# Altium PCB PowerMonito.PcbDoc
Units mil, origin at the board's own origin, x right, y up, seen from the top; angles counter-clockwise.
Board outline 24000 x 20000 mil, 4 copper layers (Top Layer, Mid-Layer 1, Mid-Layer 2, Bottom Layer); 138 components, 65 nets, 399 pads, 94 vias.
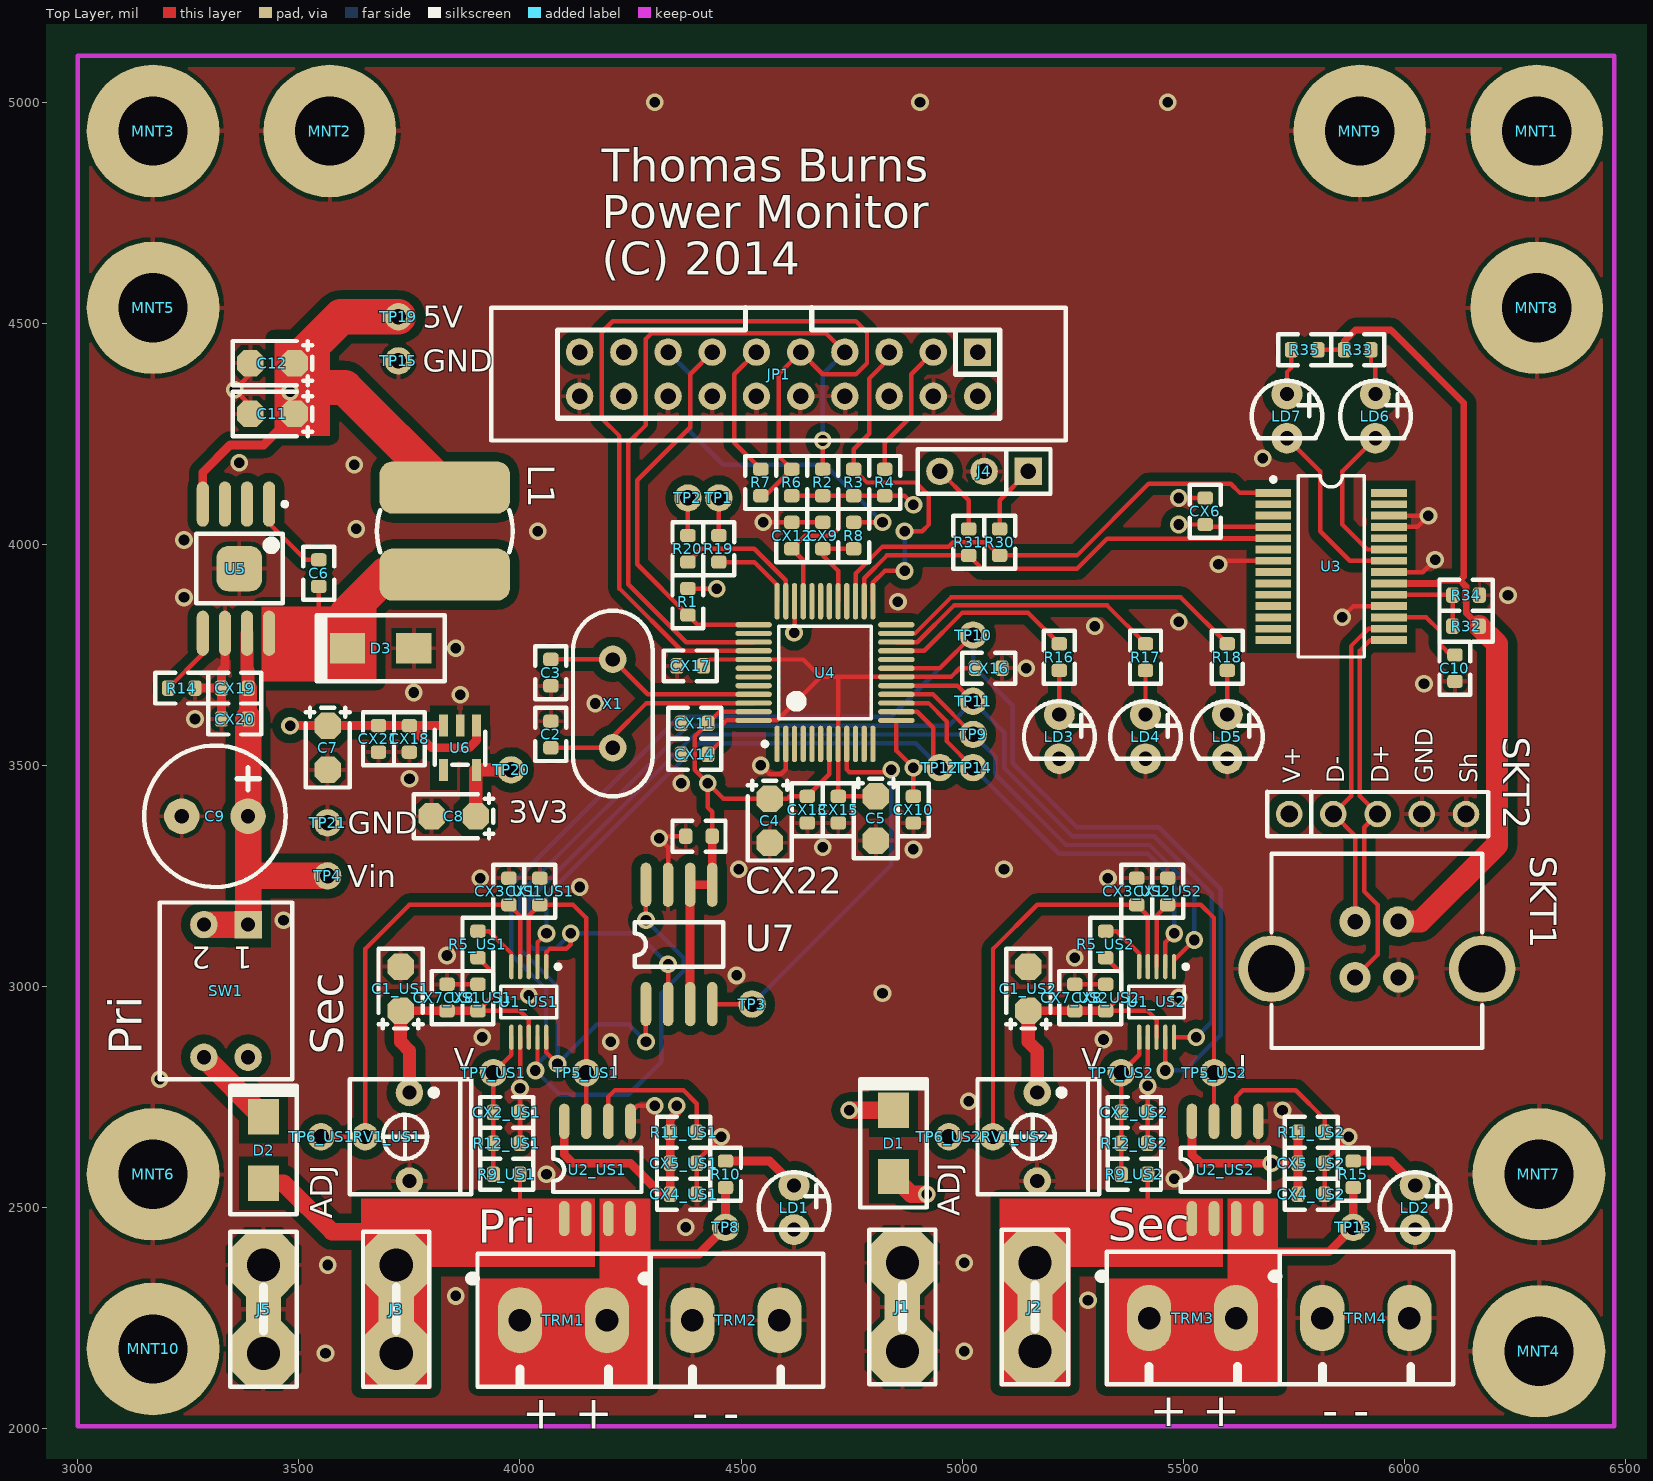
[diagram p0: Top Layer view]
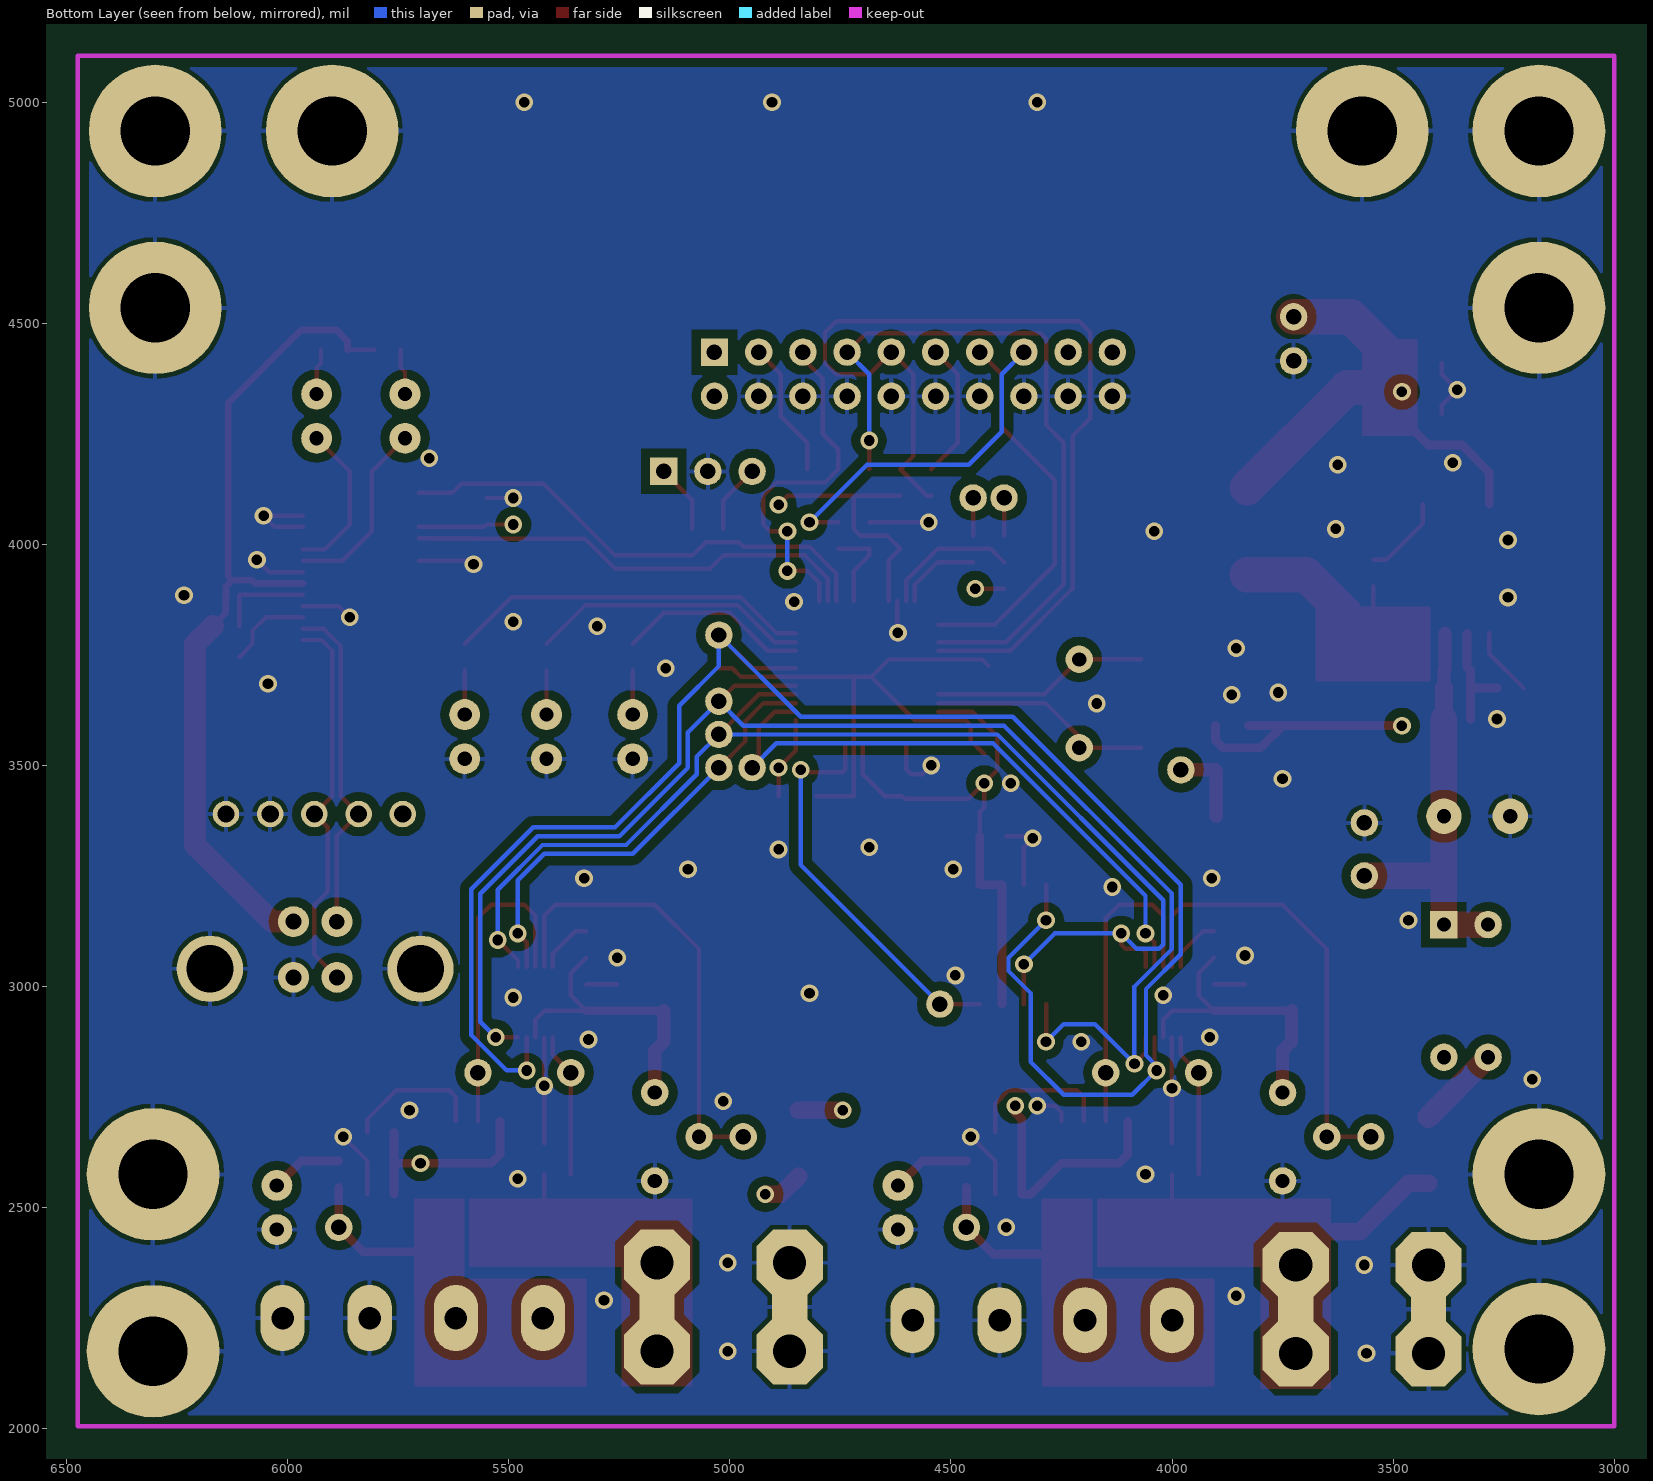
[diagram p1: Bottom Layer view, seen from below]
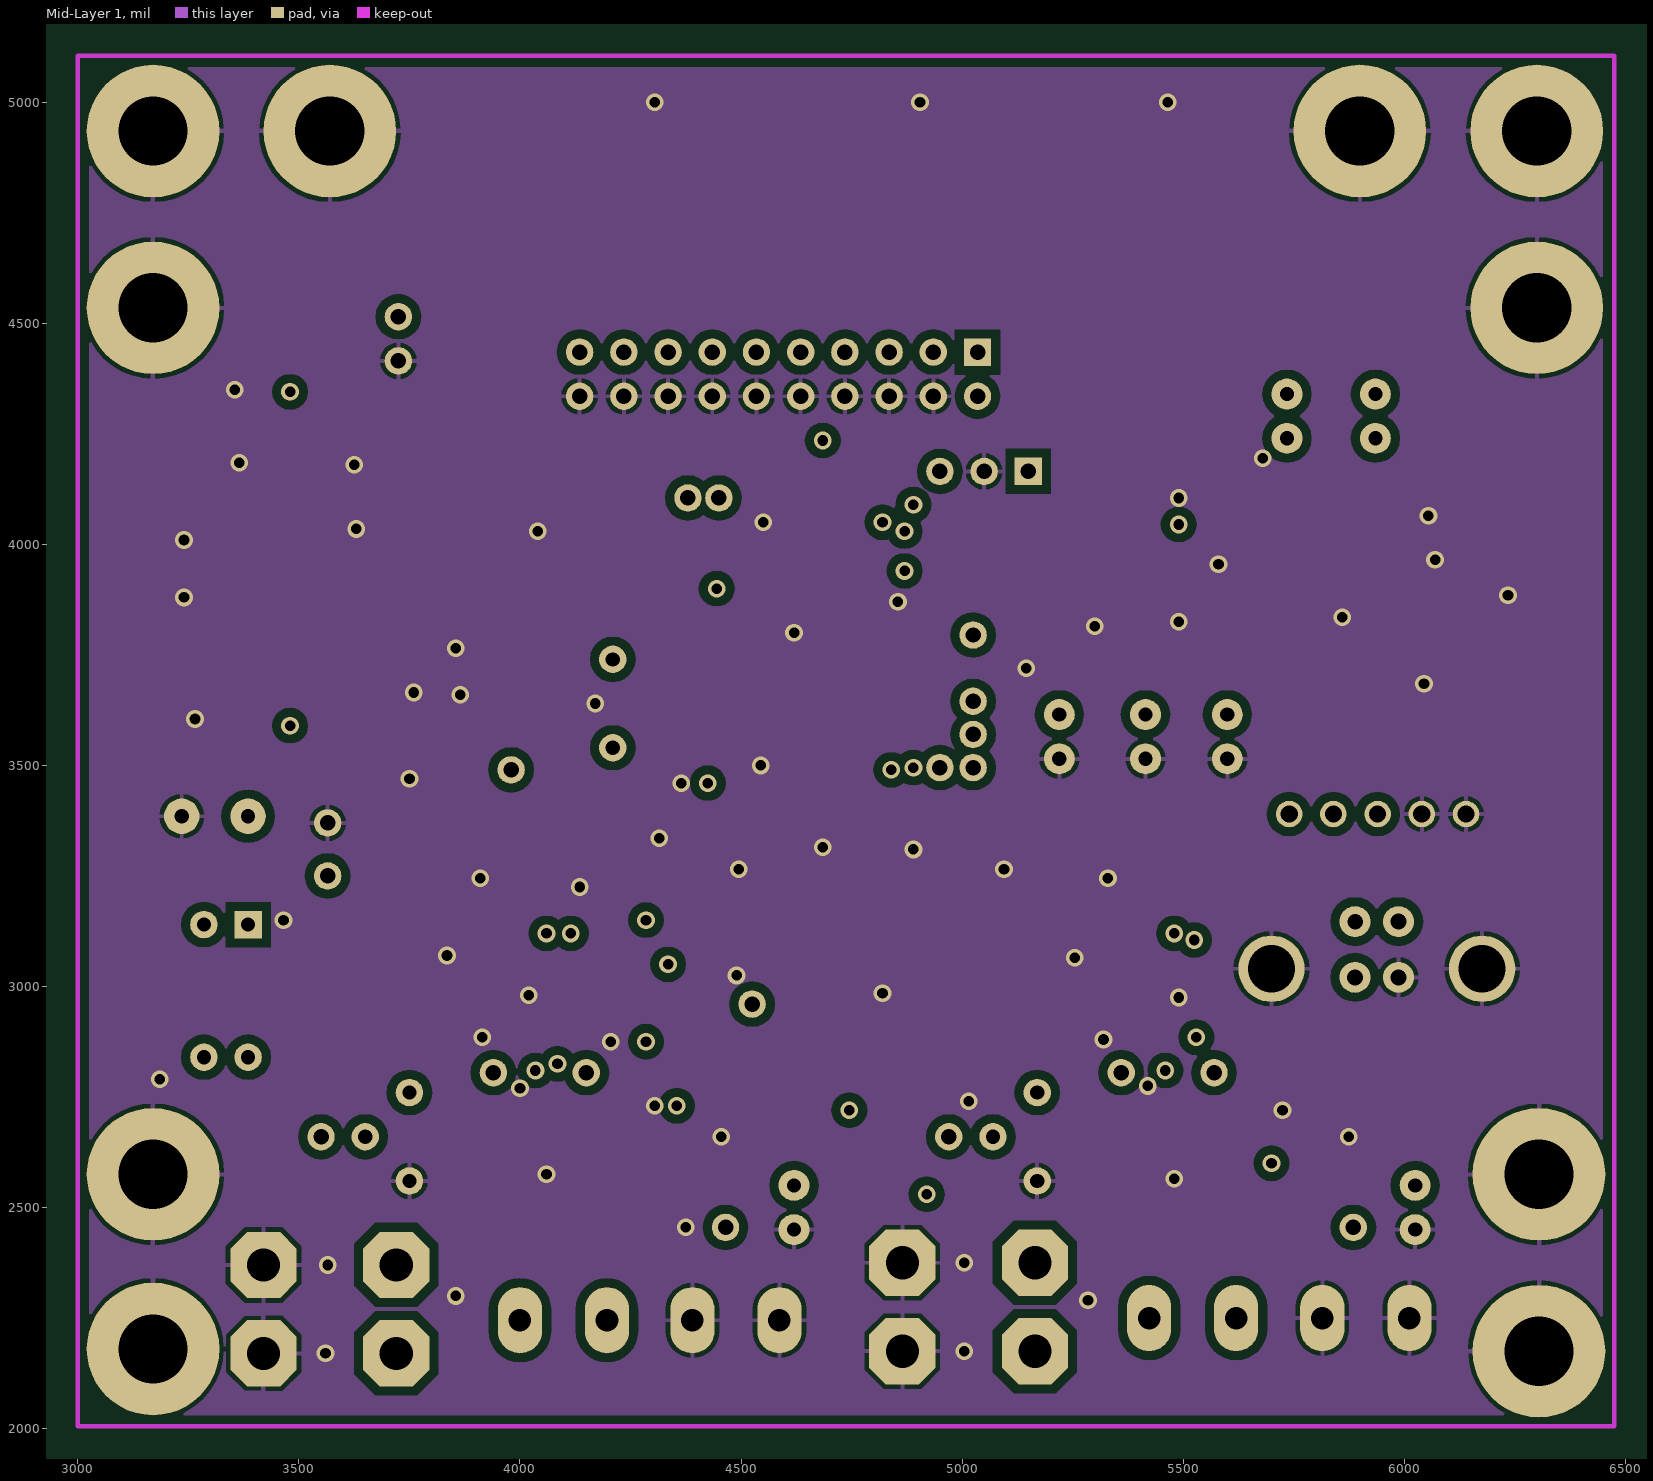
[diagram p2: Mid-Layer 1]
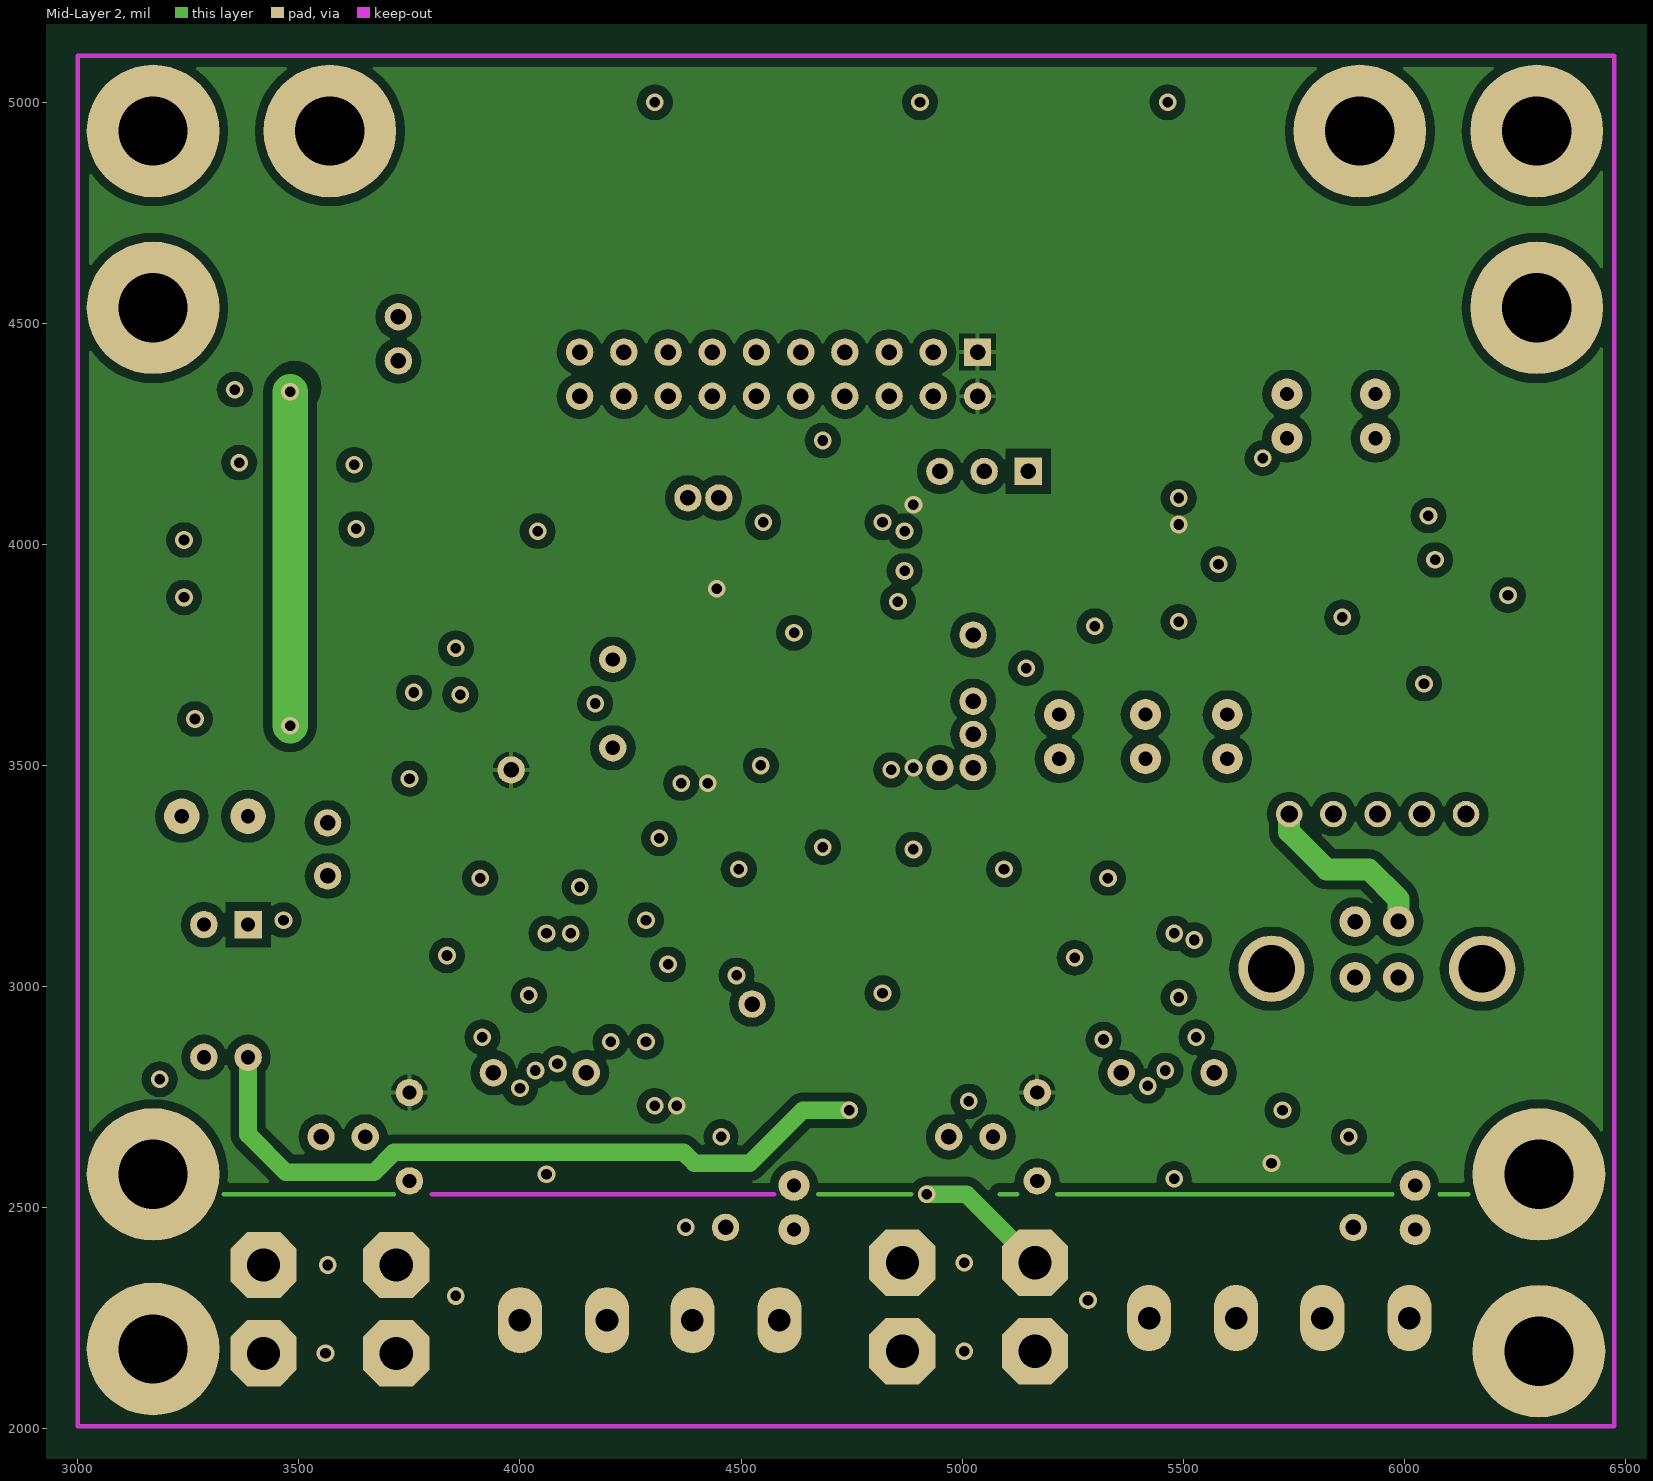
[diagram p3: Mid-Layer 2]

## Layer stack, top to bottom
Top Layer: signal copper 1.4
Dielectric: core 12.6, FR-4, Dk 4.8
Mid-Layer 1: signal copper 1.4
Dielectric: prepreg 12.6, FR-4, Dk 4.8
Mid-Layer 2: signal copper 1.4
Dielectric: core 12.6, FR-4, Dk 4.8
Bottom Layer: signal copper 1.4

## Board outline
1000,870 25000,870 25000,20870 1000,20870

## Design rules (kind name [scope] priority, off if disabled: settings)
Clearance Clearance_poly [InPoly] p1: gap=20
Clearance [All] p2: gap=7
ComponentClearance [All] p1 off: gap=10 collisioncheckmode=3 verticalgap=10 showdistances=FALSE
FabricationTestPointUsage TestPointUsage [All] p1: valid=0 allowmultiple=FALSE
FabricationTestpoint Testpoint [All] p1: side=3 testpointundercomponent=TRUE minsize=40 maxsize=100 preferedsize=60 minholesize=0 maxholesize=40 preferedholesize=32 testpointgrid=1 allowsidetop=TRUE allowsidebottom=TRUE usegrid=TRUE gridtolerance=0.01
HoleSize [All] p1: absolutevalues=TRUE maxlimit=350 minlimit=24 maxpercent=80.000 minpercent=20.000
MinimumAnnularRing [All] p1: minimumring=8
PlaneClearance [All] p1: clearance=12
PolygonConnect PolygonConnect_via [IsVia] p1: connectstyle=Direct reliefconductorwidth=10 reliefentries=4 polygonreliefangle="90 Angle" airgapwidth=10
PolygonConnect [All] p2: connectstyle=Relief reliefconductorwidth=10 reliefentries=4 polygonreliefangle="90 Angle" airgapwidth=10
RoomDefinition US1 [InComponentClass('US1')] p1: confinementstyle=ConfineIn formatcopy=TRUE lockcomponents=FALSE outline 3450,2005 4475,2005 4475,3380 3450,3380
RoomDefinition UU1 [InComponentClass('UU1')] p2: confinementstyle=ConfineIn formatcopy=TRUE lockcomponents=FALSE outline 4495,2755 6475,2755 6475,5105 4495,5105
RoomDefinition US2 [InComponentClass('US2')] p3: confinementstyle=ConfineIn formatcopy=TRUE lockcomponents=FALSE outline 4870,2005 5895,2005 5895,3380 4870,3380
RoomDefinition UP [InComponentClass('UP')] p4: confinementstyle=ConfineIn formatcopy=TRUE lockcomponents=FALSE outline 3005,3145 4040,3145 4040,4625 3005,4625
RoomDefinition U_CPU [InComponentClass('U_CPU')] p5: confinementstyle=ConfineIn formatcopy=TRUE lockcomponents=FALSE outline 3000,2005 6475,2005 6475,5105 3000,5105
RoomDefinition TopView [InComponentClass('TopView')] p6: confinementstyle=ConfineIn formatcopy=TRUE lockcomponents=FALSE outline 3000,2005 6485,2005 6485,5130 3000,5130
RoutingVias [All] p1: holewidth=24 width=40 viastyle="Through Hole" minholewidth=24 minwidth=35 maxholewidth=28 maxwidth=50
SilkscreenOverComponentPads [All vs (IsText AND OnLayer('Top Overlay'))] p1: minsilkscreentomaskgap=10
SolderMaskExpansion [All] p1: expansion=4
Width [All] p1: maxlimit=150 minlimit=10 preferedwidth=10
22 further rules are at their usual default settings.

## Classes and differential pairs
component class TopView: D1 D2 J1 J2 J3 J5 LD1 LD2 LD3 LD4 LD5 MNT1 MNT2 MNT3 MNT4 MNT5 MNT6 MNT7 MNT8 MNT9 MNT10 R10 R15 R16 R17 R18 R19 R20 SW1 TP1 TP2 TP8 TP9 TP10 TP11 TP12 TP13 TP14 TRM1 TRM2 TRM3 TRM4
component class U_CPU: C2 C3 C4 C5 CX9 CX10 CX11 CX12 CX13 CX14 CX15 CX16 CX17 CX22 JP1 R1 R2 R3 R4 R6 R7 R8 TP3 U4 U7 X1
component class UP: C6 C7 C8 C9 C11 C12 CX18 CX19 CX20 CX21 D3 L1 R14 TP4 TP15 TP19 TP20 TP21 U5 U6
component class US1: C1_US1 CX1_US1 CX2_US1 CX3_US1 CX4_US1 CX5_US1 CX7_US1 CX8_US1 R5_US1 R9_US1 R11_US1 R12_US1 RV1_US1 TP5_US1 TP6_US1 TP7_US1 U1_US1 U2_US1
component class US2: C1_US2 CX1_US2 CX2_US2 CX3_US2 CX4_US2 CX5_US2 CX7_US2 CX8_US2 R5_US2 R9_US2 R11_US2 R12_US2 RV1_US2 TP5_US2 TP6_US2 TP7_US2 U1_US2 U2_US2
component class UU1: C10 CX6 J4 LD6 LD7 R30 R31 R32 R33 R34 R35 SKT1 SKT2 U3
channel class Sensors: US1 US2

## Components (designator, comment, footprint, x,y, rotation, side; value= is the part's Value field where it differs from the comment)
C1_US1 "10uF 10V T" SMD-TANT-A 3730,2945 r90 top (schematic designator C1)
C1_US2 "10uF 10V T" SMD-TANT-A 5150,2945 r90 top (schematic designator C1)
C2 "10p" 0603 4070,3540 r90 top
C3 "10p" 0603 4070,3740 r270 top
C4 "10uF 10V T" SMD-TANT-A 4565,3425 r270 top
C5 "10uF 10V T" SMD-TANT-A 4805,3430 r270 top
C6 "10n" 0603 3545,3965 r270 top
C7 "10uF 10V T" SMD-TANT-A 3565,3590 r270 top
C8 "10uF 10V T" SMD-TANT-A 3900,3385 r180 top
C9 "220u 25V" RB.15/.32 3385,3385 r270 top
C10 "100n" 0603 6115,3690 r90 top
C11 "10uF 10V Tant" SMD-TANT-A 3490,4295 r180 top
C12 "10uF 10V Tant" SMD-TANT-A 3490,4410 r180 top
CX1_US1 "100n" 0603 4045,3245 r270 top (schematic designator CX1)
CX1_US2 "100n" 0603 5465,3245 r270 top (schematic designator CX1)
CX2_US1 "100n" 0603 3940,2715 r0 top (schematic designator CX2)
CX2_US2 "100n" 0603 5360,2715 r0 top (schematic designator CX2)
CX3_US1 "100n" 0603 3975,3245 r270 top (schematic designator CX3)
CX3_US2 "100n" 0603 5395,3245 r270 top (schematic designator CX3)
CX4_US1 "100n" 0603 4400,2530 r180 top (schematic designator CX4)
CX4_US2 "100n" 0603 5820,2530 r180 top (schematic designator CX4)
CX5_US1 "10n" 0603 4400,2600 r180 top (schematic designator CX5)
CX5_US2 "10n" 0603 5820,2600 r180 top (schematic designator CX5)
CX6 "100n" 0603 5550,4105 r270 top
CX7_US1 "100n" 0603 3835,3005 r270 top (schematic designator CX7)
CX7_US2 "100n" 0603 5255,3005 r270 top (schematic designator CX7)
CX8_US1 "10n" 0603 3905,3005 r270 top (schematic designator CX8)
CX8_US2 "10n" 0603 5325,3005 r270 top (schematic designator CX8)
CX9 "100n" 0603 4685,4050 r270 top
CX10 "100n" 0603 4890,3370 r90 top
CX11 "100n" 0603 4365,3595 r0 top
CX12 "100n" 0603 4615,4050 r270 top
CX13 "100n" 0603 4650,3370 r90 top
CX14 "100n" 0603 4365,3525 r0 top
CX15 "100n" 0603 4720,3370 r90 top
CX16 "100n" 0603 5090,3720 r180 top
CX17 "100n" 0603 4355,3725 r0 top
CX18 "100n" 0603 3750,3590 r270 top
CX19 "100n" 0603 3325,3675 r0 top
CX20 "10n" 0603 3325,3605 r0 top
CX21 "10n" 0603 3680,3530 r90 top
CX22 "100n" 0603 4375,3340 r0 top
D1 "SS14" DO-214AC 4845,2645 r270 top
D2 "SS14" DO-214AC 3420,2630 r270 top
D3 "SS14" DO-214AC 3685,3765 r0 top
J1 "SPADE" SPADE6.3-V 4865,2175 r180 top
J2 "SPADE" SPADE6.3-V 5165,2175 r180 top
J3 "SPADE" SPADE6.3-V 3720,2370 r0 top
J4 "DNF" sip3 5150,4165 r180 top
J5 "SPADE" SPADE6.3-V 3420,2170 r180 top
JP1 "HEADER 10X2" IDC20BOX 5035,4435 r180 top
L1 "330uH 1A" INDUCTOR16 3830,4030 r270 top
LD1 "LED" LED3 4620,2550 r270 top
LD2 "LED" LED3 6025,2550 r270 top
LD3 "LED" LED3 5220,3615 r270 top
LD4 "LED" LED3 5415,3615 r270 top
LD5 "LED" LED3 5600,3615 r270 top
LD6 "LED" LED3 5935,4340 r270 top
LD7 "LED" LED3 5735,4340 r270 top
MNT1 "M3 Mount Hole" Mount_M3 6300,4935 r0 top
MNT2 "M3 Mount Hole" Mount_M3 3570,4935 r0 top
MNT3 "M3 Mount Hole" Mount_M3 3170,4935 r0 top
MNT4 "M3 Mount Hole" Mount_M3 6305,2175 r0 top
MNT5 "M3 Mount Hole" Mount_M3 3170,4535 r0 top
MNT6 "M3 Mount Hole" Mount_M3 3170,2575 r0 top
MNT7 "M3 Mount Hole" Mount_M3 6305,2575 r0 top
MNT8 "M3 Mount Hole" Mount_M3 6300,4535 r0 top
MNT9 "M3 Mount Hole" Mount_M3 5900,4935 r0 top
MNT10 "M3 Mount Hole" Mount_M3 3170,2180 r0 top
R1 "47K" 0603 4380,3840 r90 top
R2 "47K" 0603 4685,4170 r270 top
R3 "47K" 0603 4755,4170 r270 top
R4 "47K" 0603 4825,4170 r270 top
R5_US1 "470R" 0603 3905,3125 r270 top (schematic designator R5)
R5_US2 "470R" 0603 5325,3125 r270 top (schematic designator R5)
R6 "47K" 0603 4615,4170 r270 top
R7 "1k" 0603 4545,4170 r270 top
R8 "1k" 0603 4755,4050 r270 top
R9_US1 "470R" 0603 3940,2575 r0 top (schematic designator R9)
R9_US2 "470R" 0603 5360,2575 r0 top (schematic designator R9)
R10 "1k" 0603 4465,2605 r270 top
R11_US1 "1k" 0603 4340,2670 r0 top (schematic designator R11)
R11_US2 "1k" 0603 5760,2670 r0 top (schematic designator R11)
R12_US1 "470R" 0603 4000,2645 r180 top (schematic designator R12)
R12_US2 "470R" 0603 5420,2645 r180 top (schematic designator R12)
R14 "DNF" 0603 3265,3675 r180 top
R15 "1k" 0603 5885,2605 r270 top
R16 "1k" 0603 5220,3715 r90 top
R17 "1k" 0603 5415,3715 r90 top
R18 "1k" 0603 5600,3715 r90 top
R19 "1k" 0603 4450,4020 r270 top
R20 "1k" 0603 4380,4020 r270 top
R30 "330R" 0603 5085,4035 r270 top
R31 "330R" 0603 5015,4035 r270 top
R32 "4k7" 0603 6170,3815 r180 top
R33 "330R" 0603 5865,4440 r0 top
R34 "10k" 0603 6170,3885 r180 top
R35 "330R" 0603 5805,4440 r180 top
RV1_US1 "2k" VR3362P 3750,2660 r90 top (schematic designator RV1)
RV1_US2 "2k" VR3362P 5170,2660 r90 top (schematic designator RV1)
SKT1 "USB B Vertical" USB_B_Vertical 5987.4,3146.69 r0 top
SKT2 "Socket Strip" USB_SocketStrip 5840,3390 r0 top
SW1 "SW-DIP2" DIPSW2 3385,3140 r180 top
TP1 "TestPad" TestPad 4450,4105 r0 top
TP2 "TestPad" TestPad 4380,4105 r90 top
TP3 "TestPad" TestPad 4525,2960 r90 top
TP4 "TestPad" TestPad 3565,3250 r0 top
TP5_US1 "TestPad" TestPad 4150,2805 r90 top (schematic designator TP5)
TP5_US2 "TestPad" TestPad 5570,2805 r90 top (schematic designator TP5)
TP6_US1 "TestPad" TestPad 3550,2660 r90 top (schematic designator TP6)
TP6_US2 "TestPad" TestPad 4970,2660 r90 top (schematic designator TP6)
TP7_US1 "TestPad" TestPad 3940,2805 r90 top (schematic designator TP7)
TP7_US2 "TestPad" TestPad 5360,2805 r90 top (schematic designator TP7)
TP8 "TestPad" TestPad 4465,2455 r90 top
TP9 "TestPad" TestPad 5025,3570 r90 top
TP10 "TestPad" TestPad 5025,3795 r90 top
TP11 "TestPad" TestPad 5025,3645 r90 top
TP12 "TestPad" TestPad 4950,3495 r90 top
TP13 "TestPad" TestPad 5885,2455 r90 top
TP14 "TestPad" TestPad 5025,3495 r90 top
TP15 "TestPad" TestPad 3725,4415 r90 top
TP19 "TestPad" TestPad 3725,4515 r90 top
TP20 "TestPad" TestPad 3980,3490 r90 top
TP21 "TestPad" TestPad 3565,3370 r90 top
TRM1 "Screw Terminal, 5mm, x2" Terms5mm2 4000,2245 r0 top
TRM2 "Screw Terminal, 5mm, x2" Terms5mm2 4390,2245 r0 top
TRM3 "Screw Terminal, 5mm, x2" Terms5mm2 5423.15,2250 r0 top
TRM4 "Screw Terminal, 5mm, x2" Terms5mm2 5815,2250 r0 top
U1_US1 "24 Bit ADC" MSOP-UN10_L 4020,2965 r270 top (schematic designator U1)
U1_US2 "24 Bit ADC" MSOP-UN10_L 5440,2965 r270 top (schematic designator U1)
U2_US1 "12.5A Current Sensor" SO-8 4100,2475 r90 top (schematic designator U2)
U2_US2 "12.5A Current Sensor" SO-8 5520,2475 r90 top (schematic designator U2)
U3 "FT232R" ssop28 5835,3950 r270 top
U4 "ATSAM4N8A" 48A_M 4690,3710 r90 top locked
U5 "LM22674MRE-5.0" PSOP-8 3365,3945 r270 top
U6 "XC6210B332MR" SOT-25-A 3827.01,3490 r0 top
U7 "AT45DB321D(8)" SO-8W-MLF 4285,2960 r90 top
X1 "12MHz" XTAL-V2 4210,3740 r270 top

## Footprints (in the part's own frame and the unit in brackets; to place one, negate y for a bottom-side part, rotate by r counter-clockwise, add the part's x,y. Pads: shape width x height; smd on the part's side, far side on the other; paste and mask are expansions set on the pad)
48A_M [mm] "48-Pin Thin Quad Flat Pack 0.5 mm Pitch, IPC Low Density"
  oval 2.1x0.3 smd: 1(-4.1,2.75) 2(-4.1,2.25) 3(-4.1,1.75) 4(-4.1,1.25) 5(-4.1,0.75) 6(-4.1,0.25) 7(-4.1,-0.25) 8(-4.1,-0.75) 9(-4.1,-1.25) 10(-4.1,-1.75) 11(-4.1,-2.25) 12(-4.1,-2.75) 25(4.1,-2.75) 26(4.1,-2.25) 27(4.1,-1.75) 28(4.1,-1.25) 29(4.1,-0.75) 30(4.1,-0.25) 31(4.1,0.25) 32(4.1,0.75) 33(4.1,1.25) 34(4.1,1.75) 35(4.1,2.25) 36(4.1,2.75)
  oval 0.3x2.1 smd: 13(-2.75,-4.1) 14(-2.25,-4.1) 15(-1.75,-4.1) 16(-1.25,-4.1) 17(-0.75,-4.1) 18(-0.25,-4.1) 19(0.25,-4.1) 20(0.75,-4.1) 21(1.25,-4.1) 22(1.75,-4.1) 23(2.25,-4.1) 24(2.75,-4.1) 37(2.75,4.1) 38(2.25,4.1) 39(1.75,4.1) 40(1.25,4.1) 41(0.75,4.1) 42(0.25,4.1) 43(-0.25,4.1) 44(-0.75,4.1) 45(-1.25,4.1) 46(-1.75,4.1) 47(-2.25,4.1) 48(-2.75,4.1)
  silkscreen extent -4.22,-2.65 2.65,3.57, body extent -3.5,-3.5 3.5,3.5, height 1.6
0603 [mil]
  rrect50% 30x35 smd: 1(0,0) 2(60,0)
  silkscreen extent -30,-35 90,35
DIPSW2 [mil]
  rect 62x62 hole 32: 1(0,0)
  round 62 hole 32: 2(100,0) 3(100,300) 4(0,300)
  silkscreen extent -100,-50 200,350
DO-214AC [mil]
  rect 80x70 smd: A(75,0) K(-75,0)
  silkscreen extent -145,-75 145,75
IDC20BOX [mil]
  rect 62x62 hole 35: 1(0,0)
  round 62 hole 35: 2(0,100) 3(100,0) 4(100,100) 5(200,0) 6(200,100) 7(300,0) 8(300,100) 9(400,0) 10(400,100) 11(500,0) 12(500,100) 13(600,0) 14(600,100) 15(700,0) 16(700,100) 17(800,0) 18(800,100) 19(900,0) 20(900,100)
  silkscreen extent -200,-100 1100,200
INDUCTOR16 [mm]
  rrect50% 3x7.5 smd: 0(-2.5,0) 1(2.5,0)
  silkscreen extent -1.21,-3.9 1.21,3.9
LED3 [mil]
  round 70 hole 32: A(0,0) K(100,0)
  silkscreen extent -30,-80 100,80
Mount_M3 [mil]
  round 300 hole 157: 1(0,0)
MSOP-UN10_L [mm] "TSSOP, 10-Leads, Body 3x3mm, Pitch 0.5mm, IPC High Density"
  oval 1.45x0.25 smd: 1(-2.025,1) 2(-2.025,0.5) 3(-2.025,0) 4(-2.025,-0.5) 5(-2.025,-1) 6(2.025,-1) 7(2.025,-0.5) 8(2.025,0) 9(2.025,0.5) 10(2.025,1)
  silkscreen extent -2.15,-1.6 0.9,1.8, body extent -1.6,-1.6 1.6,1.6, height 1.1
PSOP-8 [mm]
  oval 2.6x0.7 smd: 1(-3.711,1.717) 2(-3.711,0.447) 3(-3.711,-0.823) 4(-3.711,-2.093) 5(3.711,-2.093) 6(3.711,-0.823) 7(3.711,0.447) 8(3.711,1.717)
  rrect50% 2.6x2.6 smd: 9(0,0)
  silkscreen extent -3.84,-2.47 1.99,2.74
RB.15/.32 [mil]
  round 80 hole 32: 1(0,0) 2(0,-150)
  silkscreen extent -160,-235 160,85
sip3 [mil]
  rect 62x62 hole 35: 1(0,0)
  round 62 hole 35: 2(100,0) 3(200,0)
  silkscreen extent -50,-50 250,50
SMD-TANT-A [mil]
  oct 60x60 smd: 1(0,0) 2(100,0)
  silkscreen extent -40,-50 140,50
SO-8 [mil]
  oval 80x24 smd: 1(0,0) 2(0,-50) 3(0,-100) 4(0,-150) 5(220,-150) 6(220,-100) 7(220,-50) 8(220,0)
  silkscreen extent 60,-175 160,25
SO-8W-MLF [mil]
  oval 100x24 smd: 1(0,0) 2(0,-50) 3(0,-100) 4(0,-150) 5(270,-150) 6(270,-100) 7(270,-50) 8(270,0)
  silkscreen extent 85,-175 185,25
SOT-25-A [mil]
  rect 20x50 smd: 1(75,100) 2(37.99,100) 3(0,100) 4(0,0) 5(75,0)
  silkscreen extent -20,12 94,91
SPADE6.3-V [mil]
  oct 150x150 hole 75: 1(0,0) 1(0,-200)
  rect 80x200 smd: 1(0,-100)
  rect 80x200 smd far side: 1(0,-100)
  silkscreen extent -75,-275 75,75
ssop28 [mm] "SSOP; 28 Leads; Body Width 5.3 mm; Pitch 0.65 mm"
  rect 0.45x2.05 smd: 1(-4.225,-3.325) 2(-3.575,-3.325) 3(-2.925,-3.325) 4(-2.275,-3.325) 5(-1.625,-3.325) 6(-0.975,-3.325) 7(-0.325,-3.325) 8(0.325,-3.325) 9(0.975,-3.325) 10(1.625,-3.325) 11(2.275,-3.325) 12(2.925,-3.325) 13(3.575,-3.325) 14(4.225,-3.325) 15(4.225,3.325) 16(3.575,3.325) 17(2.925,3.325) 18(2.275,3.325) 19(1.625,3.325) 20(0.975,3.325) 21(0.325,3.325) 22(-0.325,3.325) 23(-0.975,3.325) 24(-1.625,3.325) 25(-2.275,3.325) 26(-2.925,3.325) 27(-3.575,3.325) 28(-4.225,3.325)
  silkscreen extent -5.2,-3.45 5.2,1.9
Terms5mm2 [mil]
  oval 100x150 hole 51: 1(0,0) 2(196.85,0)
  silkscreen extent -108,-150 296,150
TestPad [mil]
  round 62 hole 35: 1(0,0)
USB_B_Vertical [mm]
  round 1.778 hole 0.92: 1(0,0) 3(-2.5,-3.2) 4(0,-3.2)
  round 1.778 hole 0.889: 2(-2.5,0)
  round 3.81 hole 2.71: 5(-7.3,-2.71) 6(4.8,-2.71)
  silkscreen extent -7.3,-7.26 4.82,3.89
USB_SocketStrip [mil]
  round 60 hole 39: 1(-100,0) 2(0,0) 3(100,0) 4(200,0) 5(300,0)
  silkscreen extent -150,-50 350,50
VR3362P [mil]
  round 62 hole 32: CCW(-100,0) CW(100,0) W(0,100)
  silkscreen extent -130,-140 130,135
XTAL-V2 [mil]
  round 62 hole 32: 1(0,0) 2(200,0)
  silkscreen extent -110,-90 310,90

## Part data
C1_US1 C1_US2 C4 C5 C7 C8 C9 C11 C12: library part "CAPACITOR POL-S"
C2 C3 CX18: library part cap
C6 C10 CX1_US1 CX1_US2 CX2_US1 CX2_US2 CX3_US1 CX3_US2 CX4_US1 CX4_US2 CX5_US1 CX5_US2 CX6 CX7_US1 CX7_US2 CX8_US1 CX8_US2 CX9 CX10 CX11 CX12 CX13 CX14 CX15 CX16 CX17 CX19 CX20 CX21 CX22: library part CAP
D1 D2 D3: library part "DIODE SCHOTTKY"
J1 J2 J3 J5: library part CON1
J4: library part con3
L1: library part INDUCTOR2
MNT1 MNT2 MNT3 MNT4 MNT5 MNT6 MNT7 MNT8 MNT9 MNT10: library part M3_Mount
R1 R2 R3 R4 R6 R7 R8 R10 R14 R15 R16 R17 R18 R19 R20 R32 R33 R34 R35: library part RES8
R5_US1 R5_US2 R9_US1 R9_US2 R11_US1 R11_US2 R12_US1 R12_US2 R30 R31: library part res8
RV1_US1 RV1_US2: library part RES6
SKT1: library part USB_B_Vertical
SKT2: library part USB_Pins
TP1 TP2 TP3 TP4 TP5_US1 TP5_US2 TP6_US1 TP6_US2 TP7_US1 TP7_US2 TP8 TP9 TP10 TP11 TP12 TP13 TP14 TP15 TP19 TP20 TP21: "Test Pad"
TRM1 TRM2 TRM3 TRM4: library part ScrewTerms5mm2
U1_US1 U1_US2: library part "AD7787BRMZ 24Bit ADC", "AD7787BRMZ IC, 24BIT ADC, SMD, 7787, MSOP10"
U2_US1 U2_US2: library part ACS711_12.5A_Current, "ACS711"
U4: "Cortex-M4, 100MHz, 512K Flash, 64K SRAM"
U5: library part LM22675, "0.5A SMPS, Fixed - 5V"
U6: library part XC6204B, "3.3 LDO"
U7: library part AT45DB041(8)
X1: library part CRYSTAL

## Via types
v1: diameter 40, hole 24, Top Layer to Bottom Layer, tented both sides, 94 vias

## Nets (pads, with @x,y where several pads share a name; then routed paths per layer and width w, separated by ;. In a path a pad name is that pad's centre, name@x,y a point inside that pad or via, vN(x,y) a via of type N, cw(c..) or ccw(c..) an arc to the next point about the centre after c; other vN are vias at no path point)
ADC_VCC_IN_US1: CX2_US1.1 R9_US1.1 R12_US1.2 TP7_US1.1 U1_US1.6 | length 327.1
  Top Layer w10: R9_US1.1 TP7_US1.1 3980.63,2845.63 U1_US1.6
ADC_VCC_IN_US2: CX2_US2.1 R9_US2.1 R12_US2.2 TP7_US2.1 U1_US2.6 | length 327.1
  Top Layer w10: R9_US2.1 TP7_US2.1 5400.63,2845.63 U1_US2.6
AN1(+)_US1: CX1_US1.2 TP5_US1.1 U1_US1.3 U2_US1.7 | length 728.1
  Top Layer w10: U1_US1.3 4020,3160 CX1_US1.2 4120,3185 4150,3155 TP5_US1.1 U2_US1.7
AN1(+)_US2: CX1_US2.2 TP5_US2.1 U1_US2.3 U2_US2.7 | length 728.1
  Top Layer w10: U1_US2.3 5440,3160 CX1_US2.2 5540,3185 5570,3155 TP5_US2.1 U2_US2.7
AN1(-)_US1: CX3_US1.2 RV1_US1.W TP6_US1.1 U1_US1.4 | length 1042.2
  Top Layer w10: TP6_US1.1 RV1_US1.W 3650,3085 3750,3185 CX3_US1.2 4000.32,3159.69 U1_US1.4
AN1(-)_US2: CX3_US2.2 RV1_US2.W TP6_US2.1 U1_US2.4 | length 1042.2
  Top Layer w10: TP6_US2.1 RV1_US2.W 5070,3085 5170,3185 CX3_US2.2 5420.31,3159.69 U1_US2.4
CS1: TP12.1 U1_US1.2 U4.14 | length 1419.3
  Top Layer w10: U1_US1.2 4039.69,3099.68 v1(4060,3120) ; U4.14 4898.58,3621.42 4935,3585 4935,3510 TP12.1
  Bottom Layer w10: v1(4060,3120) 4060,3205 4405,3550 4895,3550 TP12.1
CS2: TP14.1 U1_US2.2 U4.15 | length 1024.8
  Top Layer w10: U4.15 4923.9,3641.1 4965,3600 4965,3555 TP14.1 ; U1_US2.2 5459.69,3099.68 v1(5480,3120)
  Bottom Layer w10: TP14.1 5220,3300 5420,3300 5480,3240 v1(5480,3120)
CS_DATAFLASH: TP3.1 U4.9 U7.4 | length 913.5
  Top Layer w10: U7.4 TP3.1 ; U4.9 4739.21,3490.79 4745,3485 4835,3485 v1(4840,3490)
  Bottom Layer w10: TP3.1 4840,3275 v1(4840,3490)
GND: C1_US1.2 C1_US2.2 C2.2 C3.2 C4.2 C5.2 C7.2 C8.2 C9.2 C10.1 C11.2 C12.2 CX1_US1.1 CX1_US2.1 CX2_US1.2 CX2_US2.2 CX3_US1.1 CX3_US2.1 CX4_US1.1 CX4_US2.1 CX5_US1.1 CX5_US2.1 CX6.1 CX7_US1.1 CX7_US2.1 CX8_US1.1 CX8_US2.1 CX9.1 CX10.1 CX11.1 CX12.1 CX13.1 CX14.1 CX15.1 CX16.1 CX17.1 CX18.2 CX19.1 CX20.1 CX21.1 CX22.1 D3.A J1.1 J4.2 J5.1 JP1.4 JP1.6 JP1.8 JP1.10 JP1.12 JP1.14 JP1.16 JP1.18 JP1.20 LD1.K LD2.K LD3.K LD4.K LD5.K MNT1.1 MNT2.1 MNT3.1 MNT4.1 MNT5.1 MNT6.1 MNT7.1 MNT8.1 MNT9.1 MNT10.1 R12_US1.1 R12_US2.1 R14.1 R34.1 RV1_US1.CCW RV1_US2.CCW SKT1.4 SKT1.5 SKT1.6 SKT2.4 SKT2.5 TP15.1 TP21.1 TRM2.1 TRM2.2 TRM4.1 TRM4.2 U1_US1.7 U1_US2.7 U2_US1.5 U2_US2.5 U3.7 U3.18 U3.21 U3.25 U3.26 U4.2 U4.34 U5.6 U5.9 U6.2 U7.7 | length 2622.7
  Top Layer w10: C11.2 3390,4315 v1(3355,4350) 3390,4385 C12.2 ; J5.1@3415,2175 3420,2180 J5.1@3420,2270 ; CX7_US1.1 CX8_US1.1 ; R12_US1.1 4000.32,2645.32 U1_US1.7 ; U2_US1.5 4250,2715 4265,2730 v1(4305,2730) ; U7.7 4335,3315 v1(4315,3335) 4320,3340 CX22.1 ; CX4_US1.1 CX5_US1.1 4400,2605 v1(4455,2660) ; v1(4545,3500) 4565,3480 4590,3480 4601.42,3491.42 U4.2 ; v1(4550,4050) CX12.1 CX9.1 ; v1(4620,3800) 4620,3805 4621.1,3806.1 U4.34 ; CX7_US2.1 CX8_US2.1 ; R12_US2.1 5420.31,2645.32 U1_US2.7 ; v1(5490,4105) CX6.1 ; v1(5580,3955) 5587.8,3962.8 U3.7 ; CX4_US2.1 CX5_US2.1 5820,2605 v1(5875,2660) ; v1(5860,3835) 5885.43,3860.43 U3.18 ; U3.21 6042.2,3937.2 v1(6070,3965) ; U3.25 6029.57,4039.57 v1(6055,4065) 6054.84,4065.16 U3.26
  Top Layer w20: R14.1 CX19.1 ; CX20.1 CX19.1 ; U5.6 3332.59,3722.59 3325,3715 CX19.1
  other v1: 3560,2170 5005,2175 5285,2290 3855,2300 3565,2370 5005,2375 4375,2455 5480,2565 4060,2575 5725,2720 5015,2740 4000,2770 5420.31,2775 3185,2790 4205,2875 5320,2880 3915,2885 5490,2975 4020,2980 4820,2985 4490,3025 5255,3065 3835,3070 3465,3150 4135,3225 3910,3245 5330,3245 4495,3265 5095,3265 4890,3310 4685,3315 4365,3460 3750,3470 3265,3605 4170,3640 3865,3660 3760,3665 6045,3685 5145,3720 3855,3765 5300,3815 5490,3825 4855,3870 3240,3880 6235,3885 3240,4010 4040,4030 3630,4035 3625,4180 3365,4185 5680,4195 4305,5000 4905,5000 5465,5000
MISO: TP10.1 U1_US1.9 U1_US2.9 U4.19 U7.8 | length 4297.4
  Top Layer w10: v1@4039.69,2814.68 U1_US1.9 ; v1(4285,3150) U7.8 ; U4.19 4949.84,3719.84 TP10.1 ; v1@5455,2810 5459.69,2814.68 U1_US2.9
  Bottom Layer w10: v1(4285,3150) 4370,3065 4370,3035 4320,2985 4320,2830 4245,2755 4090,2755 v1(4035,2810) 4035,2820.25 4058.97,2844.23 4058.97,2994.02 3980,3072.99 3980,3230 4360,3610 4840,3610 TP10.1 5025,3725 5115,3635 5115,3505 5260,3360 5445,3360 5585,3220 5585,2890 5505,2810 v1@5455,2810
  other v1: 5460,2810
MOSI: TP11.1 U1_US1.10 U1_US2.10 U4.17 U7.1 | length 3380.4
  Top Layer w10: U1_US1.10 4059.37,2850.63 v1(4085,2825) ; v1(4285,2875) U7.1 ; U4.17 4989.53,3680.47 TP11.1 ; U1_US2.10 5479.65,2885 v1(5530,2885)
  Bottom Layer w10: v1(4285,2875) 4245,2915 4175,2915 v1(4085,2825) 4085,3000 4000.32,3084.68 4000.32,3210.32 4380,3590 4970,3590 TP11.1 5095,3575 5095,3495 5250,3340 5435,3340 5565,3210 5565,2920 v1(5530,2885)
NetC6_1: C6.1 U5.1 | length 190.2
  Top Layer w10: U5.1 3432.59,4047.41 3515,3965 C6.1
NetC6_2: C6.2 D3.K L1.1 U5.8 | length 417.9
  Top Layer w10: C6.2 3545,3830 3550,3825
  Top Layer w80: D3.K 3610,3845 3696.57,3931.57 L1.1
NetC10_2: C10.2 U3.17 | length 198.9
  Top Layer w10: U3.17 6050.16,3834.84 6080,3805 6080,3775 C10.2@6110,3745
NetD1_K: D1.K SW1.4 | length 1748.9
  Top Layer w40: v1(4745,2720) D1.K
  Mid-Layer 2 w40: SW1.4 3385,2665 3470,2580 3670,2580 3715,2625 4370,2625 4395,2600 4520,2600 4640,2720 v1(4745,2720)
NetD2_K: D2.K SW1.3 | length 190.9
  Top Layer w50: SW1.3 D2.K
NetJ4_1: J4.1 R30.1 | length 156.9
  Top Layer w10: R30.1 5085,4100 J4.1
NetJ4_3: J4.3 R31.1 | length 156.9
  Top Layer w10: J4.3 5015,4100 R31.1
NetJP1_15: JP1.15 R8.1 | length 785.6
  Top Layer w10: R8.1 v1(4820,4050)
  Bottom Layer w10: JP1.15 4385,4385 4385,4255 4460,4180 4690,4180 v1(4820,4050)
NetLD1_A: LD1.A R10.1 | length 177.8
  Top Layer w20: R10.1 4565,2605 LD1.A
NetLD2_A: LD2.A R15.1 | length 162.8
  Top Layer w20: R15.1 5970,2605 LD2.A
NetLD3_A: LD3.A R16.1 | length 100
  Top Layer w10: LD3.A R16.1
NetLD4_A: LD4.A R17.1 | length 100
  Top Layer w10: LD4.A R17.1
NetLD5_A: LD5.A R18.1 | length 100
  Top Layer w10: LD5.A R18.1
NetLD6_A: LD6.A R33.2 | length 104.1
  Top Layer w10: R33.2 5925,4410 5935,4400 LD6.A
NetLD7_A: LD7.A R35.2 | length 104.1
  Top Layer w10: LD7.A 5735,4390 5745,4400 R35.2
NetR5_US1_1: R5_US1.1 U1_US1.5 | length 126.2
  Top Layer w10: R5_US1.1 3930,3125 3980.63,3074.37 U1_US1.5
NetR5_US2_1: R5_US2.1 U1_US2.5 | length 126.2
  Top Layer w10: R5_US2.1 5350,3125 5400.63,3074.37 U1_US2.5
NetR11_US1_2: R11_US1.2 U2_US1.6 | length 338.6
  Top Layer w10: U2_US1.6 4200,2750 4215,2765 4370,2765 4400,2735 R11_US1.2
NetR11_US2_2: R11_US2.2 U2_US2.6 | length 318.1
  Top Layer w10: U2_US2.6 5620,2750 5635,2765 5755,2765 5820,2700 R11_US2.2
NetR14_2: R14.2 U5.5 | length 156
  Top Layer w10: R14.2 3282.59,3752.59 U5.5
NetR16_2: R16.2 U4.21 | length 433.1
  Top Layer w10: U4.21 4914.21,3759.21 5000,3845 5150,3845 R16.2
NetR17_2: R17.2 U4.22 | length 634
  Top Layer w10: U4.22 4898.9,3778.9 4982,3862 5328,3862 R17.2
NetR18_2: R18.2 U4.23 | length 825.8
  Top Layer w10: U4.23 4893.58,3798.58 4975,3880 5495,3880 R18.2
NetR19_1: R19.1 TP1.1 | length 85
  Top Layer w10: R19.1 TP1.1
NetR19_2: R19.2 U4.36 | length 190
  Top Layer w10: R19.2 4530,3960 4581.73,3908.27 U4.36
NetR20_1: R20.1 TP2.1 | length 85
  Top Layer w10: R20.1 TP2.1
NetR20_2: R20.2 U4.35 | length 310.6
  Top Layer w10: R20.2 4410,3990 4530,3990 4601.42,3918.58 U4.35
NetR32_2: R32.2 R34.2 U3.19 | length 214.5
  Top Layer w10: U3.19 6108.98,3886.02 R34.2 R32.2
PRI_IN: D2.A J3.1 R9_US1.2 U2_US1.1 U2_US1.2 | length 390.6
  Top Layer w10: 4000,2480 R9_US1.2
  Top Layer w40: D2.A 3465,2555 3575,2445 3670,2445
PRI_PWR: R10.2 TP8.1 TRM1.1 TRM1.2 U2_US1.3 U2_US1.4 | length 316
  Top Layer w20: 4270,2405 4275,2395 4405,2395 TP8.1 R10.2
RST: CX9.2 R8.2 U4.29 | length 202.9
  Top Layer w10: U4.29 4719.53,3940.47 4685,3975 CX9.2 R8.2
RTCK: JP1.11 R7.1 | length 310.6
  Top Layer w10: JP1.11 4485,4385 4485,4230 R7.1
RXD0: R30.2 U3.1 U4.27 | length 1125.2
  Top Layer w10: U4.27 4760,3872.52 4760,3935 4820,3995 4970,3995 4980,4005 5055,4005 R30.2 5260,3975 5422,4137 5608,4137 5628.66,4116.34 U3.1
RXD_LED: LD7.K U3.22 | length 424.8
  Top Layer w10: LD7.K 5810,4165 5810,4030 5877.2,3962.8 U3.22
SCLK: TP9.1 U1_US1.1 U1_US2.1 U4.16 U7.2 | length 2906.8
  Top Layer w10: U1_US1.1 4059.37,3077.37 4067,3085 4105,3085 4115,3095 v1(4115,3120) ; U7.2 v1(4335,3050) ; U4.16 4934.21,3660.79 TP9.1 ; U1_US2.1 5479.37,3059.37 v1(5525,3105)
  Bottom Layer w10: v1(4335,3050) 4265,3120 v1(4115,3120) 4080,3085 4030,3085 4020,3095 4020,3195 4395,3570 TP9.1 5075,3520 5075,3480 5235,3320 5424.04,3320 5525,3219.04 v1(5525,3105)
SEC_IN: D1.A J2.1 R9_US2.2 U2_US2.1 U2_US2.2 | length 495.8
  Top Layer w10: 5420,2480 R9_US2.2
  Top Layer w40: D1.A 4885,2530 v1(4920,2530)
  Mid-Layer 2 w40: v1(4920,2530) 5010,2530 J2.1@5165,2375
SEC_PWR: R15.2 TP13.1 TRM3.1 TRM3.2 U2_US2.3 U2_US2.4 | length 302.8
  Top Layer w20: 5695,2400 5830,2400 TP13.1 R15.2
TCK: JP1.9 R6.1 R7.2 U4.40 | length 2223.2
  Top Layer w10: U4.40 4365.79,3759.21 4225,3900 4225,4245 4185,4285 4185,4480 4210,4505 4760,4505 4785,4480 4785,4410 4760,4385 4685,4385 JP1.9 4585,4385 4585,4200 R6.1 4555,4110 R7.2
TDI: JP1.5 R3.1 U4.25 | length 833.9
  Top Layer w10: U4.25 4798.27,3913.27 4825,3940 v1(4870,3940) ; JP1.5 4835,4420 4790,4375 4790,4250 4755,4215 R3.1 4785,4140 4895,4140 4925,4110 4925,4045 4910,4030 v1(4870,4030)
  Bottom Layer w10: v1(4870,3940) v1(4870,4030)
TDO: JP1.13 R1.1 U4.37 | length 870.6
  Top Layer w10: JP1.13 4385,4385 4385,4265 4265,4145 4265,3955 R1.1 4401.73,3818.27 U4.37
TMS: JP1.7 R2.1 U4.39 | length 1668.4
  Top Layer w10: U4.39 4376.1,3778.9 4245,3910 4245,4230 4285,4270 4285,4465 4298,4478 4692,4478 JP1.7 ; R2.1 v1(4685,4235)
  Bottom Layer w10: v1(4685,4235) 4685,4385 JP1.7
TRST: JP1.3 R4.1 | length 310.6
  Top Layer w10: R4.1 4825,4230 4885,4290 4885,4385 JP1.3
TXD0: R31.2 U3.5 U4.26 | length 1140
  Top Layer w10: U4.26 4778.58,3923.58 4830,3975 R31.2 5045,3945 5260,3945 5328,4013 U3.5@5678,4013 ; 5578,4013 5578.98,4013.98 U3.5
TXD_LED: LD6.K U3.23 | length 355.4
  Top Layer w10: LD6.K 5860,4165 5860,4045 5916.61,3988.39 U3.23
USB_DM: SKT1.2 SKT2.2 U3.16 | length 762.3
  Top Layer w10: SKT1.2 5888.98,3341.02 SKT2.2 5880,3430 5880,3770 5919.25,3809.25 U3.16
USB_DP: SKT1.3 SKT2.3 U3.15 | length 877.6
  Top Layer w10: SKT1.3 5940,3071.73 5940,3185 5910,3215 5910,3360 SKT2.3 5900,3430 5900,3760 5923.66,3783.66 U3.15
USB_VCC: R32.1 R33.1 R35.1 SKT1.1 SKT2.1 U3.20 | length 2383
  Top Layer w10: R35.1 R33.1 ; 6071.61,3911.61 6080,3920 6125,3920
  Top Layer w15: R33.1 5865,4460 5890,4485 5970,4485 6135,4320 6135,3927.42 6126.29,3918.71 ; U3.20 6071.61,3911.61 6074.19,3911.61 6081.29,3918.71 6126.29,3918.71 ; R32.1 6140.5,3844.5 6140.5,3869.5 6140,3870 6140,3905 6126.29,3918.71
  Top Layer w50: SKT1.1 6036.69,3146.69 6210,3320 6210,3775 R32.1
  Mid-Layer 2 w50: SKT2.1 5740,3350 5825,3265 5920,3265 5987.4,3197.6 SKT1.1
VCC_3V3: C1_US1.1 C1_US2.1 C4.1 C8.1 CX4_US1.2 CX4_US2.2 CX5_US1.2 CX5_US2.2 CX6.2 CX7_US1.2 CX7_US2.2 CX8_US1.2 CX8_US2.2 CX10.2 CX11.2 CX12.2 CX13.2 CX22.2 JP1.1 JP1.2 R1.2 R2.2 R3.2 R4.2 R5_US1.2 R5_US2.2 R6.2 R11_US1.1 R11_US2.1 RV1_US1.CW RV1_US2.CW TP20.1 U1_US1.8 U1_US2.8 U2_US1.8 U2_US2.8 U3.4 U4.7 U4.13 U4.33 U4.47 U6.5 U7.3 U7.5 U7.6 | length 4925.2
  Top Layer w10: R5_US1.2 3940,3030 3940,2980 CX8_US1.2 3999.57,2945 4020,2924.57 U1_US1.8 ; CX5_US1.2 R11_US1.1 ; R1.2 v1(4445,3900) ; CX22.2 4435,3395 4425,3405 v1(4425,3460) ; U4.47 4451.42,3621.42 CX11.2 4395,3565 4395,3490 v1(4425,3460) ; R6.2 R2.2 4720,4110 ; U4.33 4640.79,3964.21 CX12.2 4645,4020 4705,4020 4720,4035 4720,4110 ; U4.7 4699.84,3479.84 CX13.2 4610,3430 4605,3425 C4.1 4460,3425 v1(4425,3460) ; U4.13 4851.42,3533.58 v1(4890,3495) CX10.2 ; v1(4890,4090) 4870,4110 R4.2 R3.2 4720,4110 ; R5_US2.2 5360,3030 5360,2980 CX8_US2.2 5419.57,2945 5440,2924.57 U1_US2.8 ; v1(5490,4045) CX6.2 5555.43,4039.57 U3.4
  Top Layer w20: C1_US1.1 CX8_US1.2 ; U2_US1.8 4100,2620 4120,2600 4250,2600 4320,2530 CX4_US1.2 R11_US1.1 4340,2700 4355,2715 v1(4355,2730) ; U7.3 U7.6 U7.5 CX22.2 ; C1_US2.1 CX7_US2.2 CX8_US2.2 ; U2_US2.8 5520,2620 5540,2600 CX5_US2.2 ; CX4_US2.2 R11_US2.1
  Top Layer w30: C1_US1.1 3730,2875 3750,2855 RV1_US1.CW ; C8.1 3900,3487.99 U6.5 TP20.1 ; C1_US2.1 5150,2875 5170,2855 RV1_US2.CW
  other v1: 5700,2600
VCC_5V: C7.1 C11.1 C12.1 CX18.1 CX21.2 L1.0 TP19.1 U5.4 U6.1 U6.3 | length 2415.9
  Top Layer w20: U5.4 3282.59,4162.59 3345,4225 3420,4225 C11.1 ; v1@3475,4355 3490,4355 C12.1@3490,4395 ; v1(3480,3590) C7.1 CX21.2 CX18.1 ; U6.3 CX18.1 ; U6.1 3902.01,3557.01 3885,3540 3800,3540 CX18.1
  Top Layer w80: v1@3490,4355 3603.43,4355 L1.0 ; C12.1 3595,4515 TP19.1
  Mid-Layer 2 w80: v1(3480,3590) v1(3480,4345)
VDD_CORE: C5.1 CX14.2 CX15.2 CX16.2 CX17.2 U4.8 U4.18 U4.41 U4.48 | length 1349.3
  Top Layer w10: CX17.2 4429.53,3739.53 U4.41 4640.79,3739.53 4680.16,3700.16 ; CX14.2 4455,3555 4455,3590 4466.73,3601.73 U4.48 4528.77,3601.92 4581.92,3601.92 4680.16,3700.16 ; C5.1 CX15.2 4719.53,3430.47 U4.8 4719.53,3699.69 4720,3700.16 ; CX16.2 4995,3720 4975.16,3700.16 U4.18 4720,3700.16 ; 4680.16,3700.16 4720,3700.16
VIN: C9.1 CX19.2 CX20.2 SW1.1 SW1.2 TP4.1 U5.7 | length 939.9
  Top Layer w30: U5.7 3382.59,3717.41 3385,3715 CX19.2
  Top Layer w40: CX20.2 CX19.2
  Top Layer w60: SW1.2 SW1.1 3385,3250 ; CX20.2 C9.1 3385,3250 ; TP4.1 3385,3250
XIN: C2.1 U4.46 X1.2 | length 515.1
  Top Layer w10: C2.1 X1.2 4210,3565 4286.1,3641.1 U4.46
XOUT: C3.1 U4.45 X1.1 | length 491.4
  Top Layer w10: C3.1 X1.1 4289.21,3660.79 U4.45
pads on no net: JP1.17 JP1.19 U3.2 U3.3 U3.6 U3.8 U3.9 U3.10 U3.11 U3.12 U3.13 U3.14 U3.24 U3.27 U3.28 U4.1 U4.3 U4.4 U4.5 U4.6 U4.10 U4.11 U4.12 U4.20 U4.24 U4.28 U4.30 U4.31 U4.32 U4.38 U4.42 U4.43 U4.44 U5.2 U5.3 U6.4
copper on no net: | length 1458.6
  Mid-Layer 2 w10: 3330,2530 3715,2530 ; 4675,2530 4885,2530 ; 5085,2530 5125,2530 ; 5215,2530 5973.62,2530 ; 6080,2530 6145,2530

## Polygon pours and split planes (outlines as drawn)
VDD_CORE on Top Layer "VDD_CORE" (solid, remove dead copper, pour order 9): 4585.67,3605.67 4794.33,3605.67 4794.33,3814.33 4585.67,3814.33
GND on Top Layer "GND" (solid, remove dead copper, pour order 13): 3000,2005 3000,5105 6475,5105 6475,2005
VCC_3V3 on Mid-Layer 2 "VCC_3V3" (solid, remove dead copper, pour order 10): 3000,2005 6475,2005 6475,5105 3000,5105
GND on Mid-Layer 1 "GND" (solid, remove dead copper, pour order 12): 3000,2005 3000,5105 6475,5105 6475,2005
GND on Bottom Layer "GND" (solid, remove dead copper, pour order 11): 3000,2005 3000,5105 6475,5105 6475,2005

## Keep-outs
Mid-Layer 2:
  lines w10: 3800,2530 4575,2530
Keep-Out Layer:
  lines w10: 3000,2005 3000,5105 6475,5105 6475,2005 3000,2005

## Other copper
Top Layer:
  rectangle net VCC_5V: 3445,4245 3570,4465
  rectangle net PRI_IN: 3640,2365 4170,2520
  rectangle net PRI_IN: 3640,2090 3800,2390
  rectangle net PRI_PWR: 4180,2295 4295,2520
  rectangle net PRI_PWR: 3904,2095 4294,2339.49
  rectangle net SEC_PWR: 5324,2095 5714,2339.49
  rectangle net SEC_PWR: 5600,2295 5715,2520
  rectangle net SEC_IN: 5085,2365 5590,2520
  rectangle net SEC_IN: 5085,2095 5245,2435
  rectangle net NetC6_2: 3415,3690 3675,3860

## Silkscreen, mask and mechanical layers (free items; w line width, h text height)
Top Overlay:
  text "Thomas Burns" at 4185,4820 h75
  text "Power Monitor" at 4185,4715 h75
  text "(C) 2014" at 4185,4610 h75
  text "5V" at 3780,4490 h50
  text "GND" at 3780,4390 h50
  text "3V3" at 3975,3370 h50
  text "GND" at 3610,3345 h50
  text "Vin" at 3609.8,3224.88 h50
  text "Pri" at 3145,2845 h75 r90
  text "Sec" at 3600,2845 h75 r90
  text "V" at 3850,2810 h50
  text "V" at 5270,2810 h50
  text "I" at 4205,2795 h50
  text "I" at 5625,2795 h50
  text "ADJ" at 4995,2480 h50 r90
  text "ADJ" at 3575,2475 h50 r90
  text "Sec" at 5330,2425 h75
  text "Pri" at 3905,2420 h75
  text "+ +" at 5425,2005 h75
  text "- -" at 5815,2005 h75
  text "+ +" at 4005,2000 h75
  text "- -" at 4390,2000 h75
Mechanical 1:
  lines w10: 3000,2005 6475,2005 6475,5105 3000,5105 3000,2005
Mechanical 3:
  lines w10: 3170,4535 3170,4935 3570,4935 ; 5900,4935 6300,4935 6300,4535

## Dimensions
3000,2005 to 3000,5105 on Mechanical 2
3000,2005 to 6475,2005 on Mechanical 2

## Text inside footprints (layer, text, board x,y; h text height)
SKT2: Top Overlay "Sh" at 6165,3460 h40 r90; Top Overlay "GND" at 6065,3460 h40 r90; Top Overlay "D+" at 5965,3460 h40 r90; Top Overlay "D-" at 5865,3460 h40 r90; Top Overlay "V+" at 5765,3460 h40 r90
SW1: Top Overlay "1" at 3395,3090 h50 r180; Top Overlay "2" at 3300,3090 h50 r180